# Altium PCB USB_to_CAN.PcbDoc
Units mil, origin at the board's own origin, x right, y up, seen from the top; angles counter-clockwise.
Board outline 3030 x 1665 mil, 2 copper layers (Top Layer, Bottom Layer); 33 components, 27 nets, 158 pads, 26 vias.
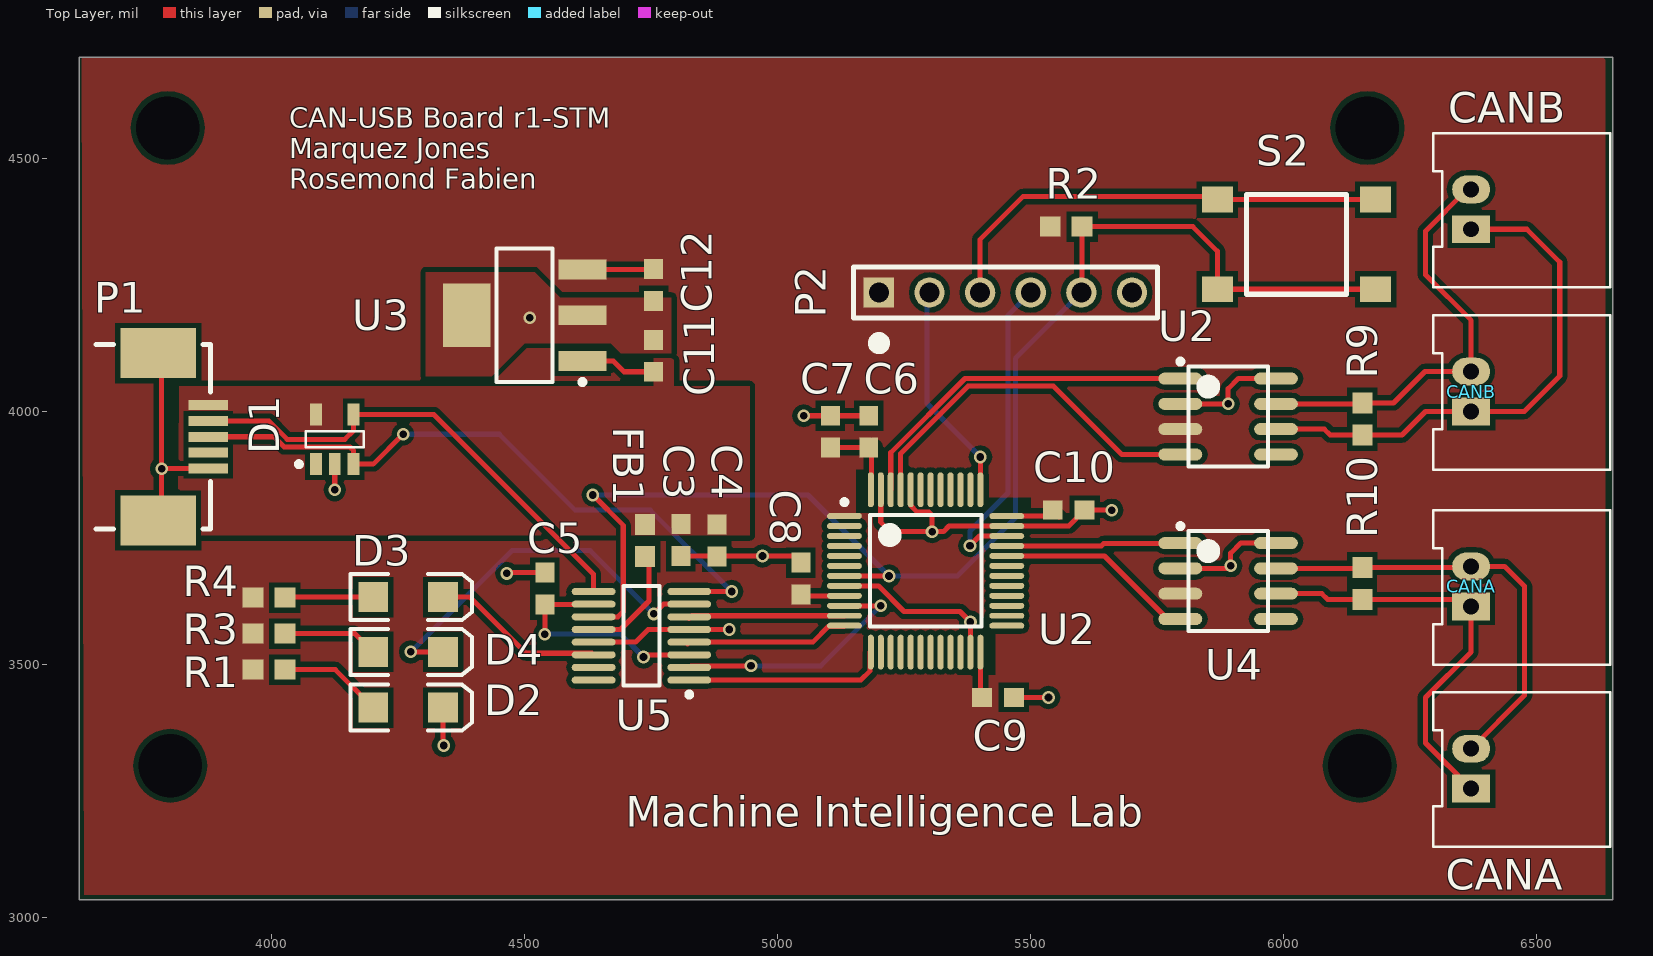
[diagram p0: Top Layer view]
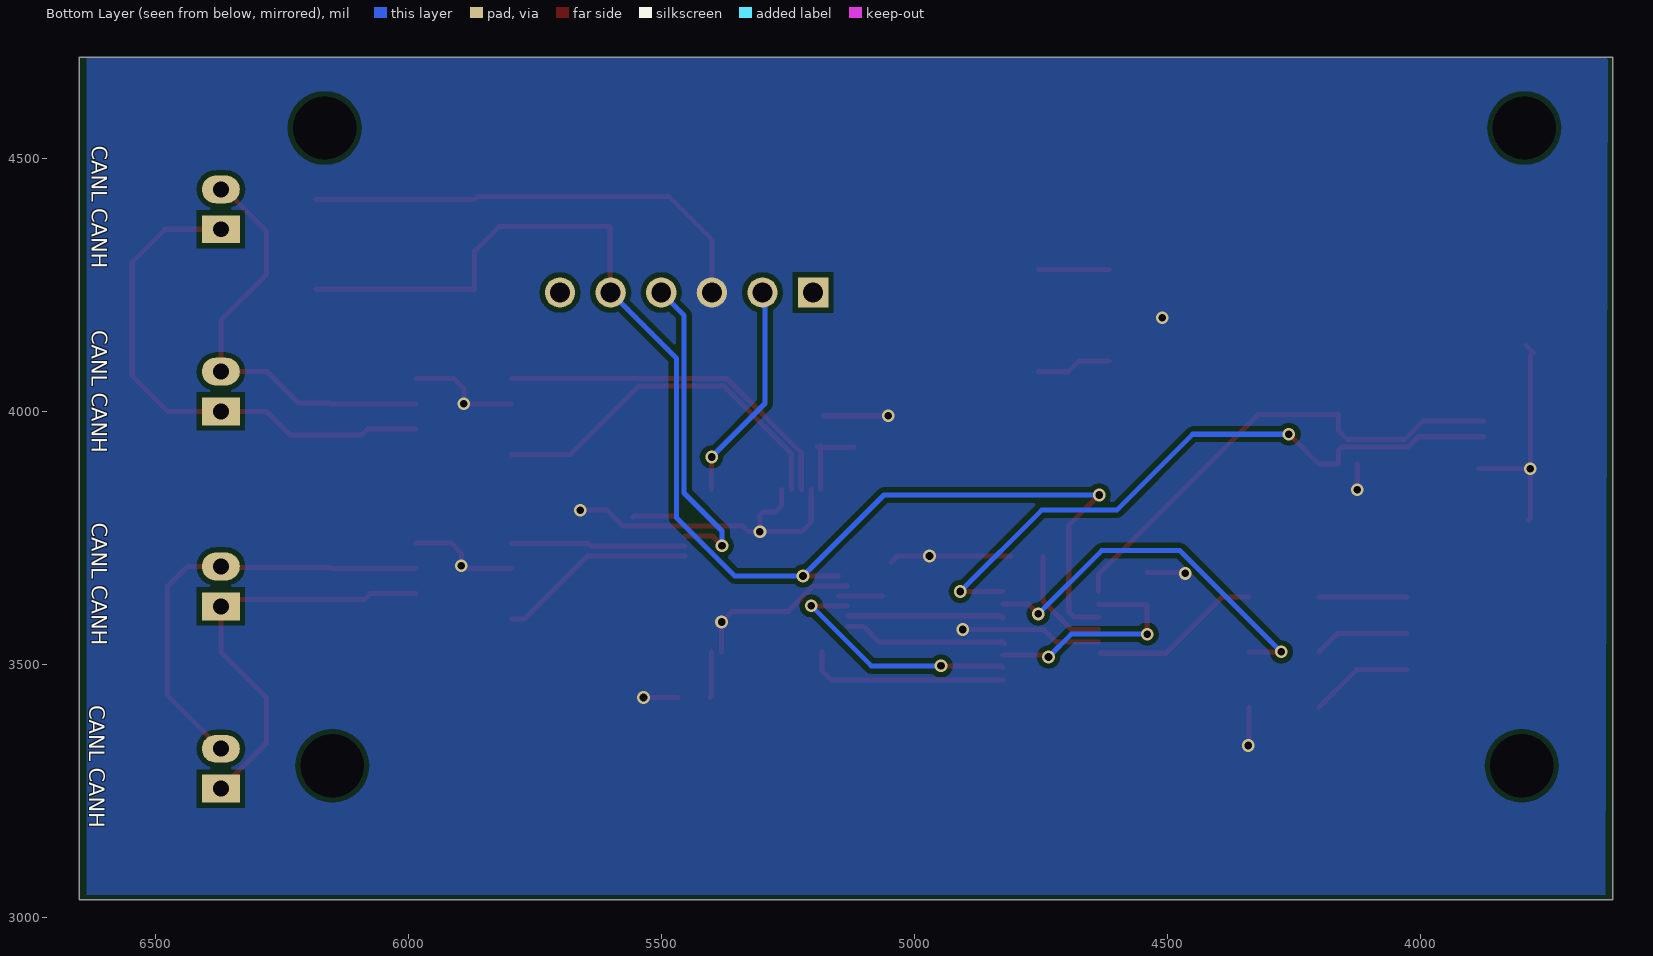
[diagram p1: Bottom Layer view, seen from below]

## Layer stack, top to bottom
Top Solder: solder mask 0.4, Solder Resist, Dk 3.5
Top Layer: signal copper 1.4
Dielectric 1: dielectric 12.6, FR-4, Dk 4.8
Bottom Layer: signal copper 1.4
Bottom Solder: solder mask 0.4, Solder Resist, Dk 3.5

## Board outline
3620,3035 3620,4700 6650,4700 6650,3035

## Design rules (kind name [scope] priority, off if disabled: settings)
Clearance [All] p1: gap=10 ignorepadtopadclearanceinfootprint=FALSE except(0: Arc-Hole Track-Hole SMDPad-Hole THPad-Hole Via-Hole Fill-Hole Poly-Hole Region-Hole Text-Hole; 5: Track-Track Track-SMDPad SMDPad-SMDPad; 7: Track-Via)
MinimumSolderMaskSliver [All] p1: minsoldermaskwidth=5
PolygonConnect [All] p1: connectstyle=Direct reliefconductorwidth=10 reliefentries=4 polygonreliefangle="90 Angle" airgapwidth=10
RoutingVias [All] p1: holewidth=28 width=50 viastyle="Through Hole" minholewidth=28 minwidth=50 maxholewidth=28 maxwidth=50
SolderMaskExpansion [All] p1: expansion=4
Width [All] p1: maxlimit=10 minlimit=10 preferedwidth=10
29 further rules are at their usual default settings.

## Classes and differential pairs
component class USB_to_CAN: C3 C4 C5 C6 C7 C8 C9 C10 C11 C12 CANA CANB D1 D2 D3 D4 FB1 P1 P2 R1 R2 R3 R4 R9 R10 S2 U2 U3 U4 U5

## Components (designator, comment, footprint, x,y, rotation, side; value= is the part's Value field where it differs from the comment)
C3 "Cap" CAPC0603 4808.97,3745.97 r270 top value=4.7uF
C4 "Cap" CAPC0603 4880,3745 r270 top value=100nF
C5 "Cap" CAPC0603 4540,3650 r90 top value=100nF
C6 "Cap" CAPC0603 5180,3960 r90 top value=1uF
C7 "Cap" CAPC0603 5103.97,3960 r90 top value=10nF
C8 "Cap" CAPC0603 5046.04,3670 r90 top value=100nF
C9 "Cap" CAPC0603 5435,3435 r0 top value=100nF
C10 "Cap" CAPC0603 5575,3805 r0 top value=100nF
C11 "Cap" CAPC0603 4755,4110 r90 top value=1uF
C12 "Cap" CAPC0603 4755,4250 r270 top value=1uF
CANA "2-pin Horz Sherlock" MOLEX-HDR-1X2-SHERLOCK-HORZ 6370,3615 r270 top
CANA "2-pin Horz Sherlock" MOLEX-HDR-1X2-SHERLOCK-HORZ 6370,3255 r270 top
CANB "2-pin Horz Sherlock" MOLEX-HDR-1X2-SHERLOCK-HORZ 6370,4360 r270 top
CANB "2-pin Horz Sherlock" MOLEX-HDR-1X2-SHERLOCK-HORZ 6370,4000 r270 top
D1 "824011" SOT95P280X116-5N 4125,3945 r90 top
D2 "LED2" 3.2X1.6X1.1 4270,3415 r0 top
D3 "LED2" 3.2X1.6X1.1 4270,3633.44 r0 top
D4 "LED2" 3.2X1.6X1.1 4270,3525 r0 top
FB1 "FBead" RES0603 4737.93,3745 r270 top
P1 "UX60SC-MB-5ST" UX60SC-MB-5ST 3874.99,3950 r270 top
P2 "SWD" SWD_STM32 5200,4235 r90 top
R1 "Res" RES0603 3995,3490 r0 top value=1k
R2 "Res" RES0603 5570,4365 r0 top value=1k
R3 "Res" RES0603 3995,3561.03 r0 top value=1k
R4 "Res" RES0603 3995,3632.07 r0 top value=1k
R9 "Res" RES0603 6155,3985 r90 top value=120
R10 "Res" RES0603 6155,3660 r90 top value=120
S2 "Button" PTS645xxxxSMTR92 6025,4330 r0 top
U2 "SN65HVD230DR" SOIC-8pin 5890,3990 r0 top
U2 "STM32F072CB" STM32F072CB 5292.27,3685 r0 top
U3 "3.3V LDO Reg" SOT23-4n 4500,4190 r180 top
U4 "SN65HVD230DR" SOIC-8pin 5890,3665 r0 top
U5 "FT230XS" FT230XS 4730.86,3556.76 r180 top

## Footprints (in the part's own frame and the unit in brackets; to place one, negate y for a bottom-side part, rotate by r counter-clockwise, add the part's x,y. Pads: shape width x height; smd on the part's side, far side on the other; paste and mask are expansions set on the pad)
3.2X1.6X1.1 [mm] "SMT LED; 2 Flat Leads"
  rect 1.5x1.5 smd: 1(-1.75,0) 2(1.75,0)
  silkscreen extent -2.9,-1.15 3.2,1.15
CAPC0603 [mm] "Chip Capacitor, 2-Leads, Body 1.60x0.80mm, IPC Medium Density"
  rect 1x0.95 smd: 1(-0.8,0) 2(0.8,0)
  body extent -0.88,-0.48 0.87,0.48, height 0.8
FT230XS [mm] "SOP, 16-Leads, Body 4.90x3.90mm, Pitch 0.64mm, IPC Medium Density"
  oval 2.2x0.35 smd: 1(-2.4,2.222) 2(-2.4,1.587) 3(-2.4,0.952) 4(-2.4,0.317) 5(-2.4,-0.318) 6(-2.4,-0.953) 7(-2.4,-1.588) 8(-2.4,-2.223) 9(2.4,-2.222) 10(2.4,-1.587) 11(2.4,-0.952) 12(2.4,-0.317) 13(2.4,0.318) 14(2.4,0.953) 15(2.4,1.588) 16(2.4,2.223)
  silkscreen extent -2.53,-2.5 0.9,3.07, body extent -2,-2.5 2,2.5, height 1.76
MOLEX-HDR-1X2-SHERLOCK-HORZ [mm]
  rect 1.397x1.905 hole 0.8: 1(0,0)
  oval 1.397x1.905 hole 0.8: 2(-2,0)
  silkscreen extent -4.83,-1.91 2.92,6.98, body extent -4.83,-1.91 2.87,8.59, height 5.54
PTS645xxxxSMTR92 [mm] "PTS645 Series SMT 6 mm Tactile Switch"
  rect 1.555x1.3 smd: A(-3.975,2.25) A(3.975,2.25) B(-3.975,-2.25) B(3.975,-2.25)
  silkscreen extent -2.5,-2.5 2.5,2.5, body extent -3,-3 3,3, height 4.5
RES0603 [mm] "Chip Resistor, 2-Leads, Body 1.60x0.80mm, IPC Medium Density"
  rect 1.05x1 smd: 1(-0.8,0) 2(0.8,0)
  body extent -0.88,-0.48 0.87,0.47, height 0.8
SOIC-8pin [mm] "For 296-1345-1-ND"
  oval 2.2x0.6 smd: 1(-2.4,1.905) 2(-2.4,0.635) 3(-2.4,-0.635) 4(-2.4,-1.905) 5(2.4,-1.905) 6(2.4,-0.635) 7(2.4,0.635) 8(2.4,1.905)
  silkscreen extent -2.52,-2.5 2,2.88, body extent -2,-2.5 2,2.5, height 1.75
SOT23-4n [mm] "SOT223, 4-Leads, Body 6.50x7.00mm (avg), Pitch 2.30mm, IPC Medium Density"
  rect 2.4x1 smd: 1(-2.9,2.3) 2(-2.9,0) 3(-2.9,-2.3)
  rect 2.4x3.2 smd: 4(2.9,0)
  silkscreen extent -3.03,-3.35 1.4,3.47, body extent -1.85,-3.35 1.85,3.35, height 1.7
SOT95P280X116-5N [mm] "SOT23, 5-Leads, Body 2.90x2.80mm, Pitch 0.95mm, IPC Medium Density"
  rect 1.1x0.6 smd: 1(-1.25,0.95) 2(-1.25,0) 3(-1.25,-0.95) 4(1.25,-0.95) 5(1.25,0.95)
  silkscreen extent -1.37,-1.45 0.4,1.92, body extent -0.8,-1.45 0.8,1.45, height 1.16
STM32F072CB [mm] "TSQFP, 48-Leads, Body 7.00x7.00mm, Pitch 0.50mm, IPC Medium Density"
  oval 1.75x0.3 smd: 1(-4.075,2.75) 2(-4.075,2.25) 3(-4.075,1.75) 4(-4.075,1.25) 5(-4.075,0.75) 6(-4.075,0.25) 7(-4.075,-0.25) 8(-4.075,-0.75) 9(-4.075,-1.25) 10(-4.075,-1.75) 11(-4.075,-2.25) 12(-4.075,-2.75) 25(4.075,-2.75) 26(4.075,-2.25) 27(4.075,-1.75) 28(4.075,-1.25) 29(4.075,-0.75) 30(4.075,-0.25) 31(4.075,0.25) 32(4.075,0.75) 33(4.075,1.25) 34(4.075,1.75) 35(4.075,2.25) 36(4.075,2.75)
  oval 0.3x1.75 smd: 13(-2.75,-4.075) 14(-2.25,-4.075) 15(-1.75,-4.075) 16(-1.25,-4.075) 17(-0.75,-4.075) 18(-0.25,-4.075) 19(0.25,-4.075) 20(0.75,-4.075) 21(1.25,-4.075) 22(1.75,-4.075) 23(2.25,-4.075) 24(2.75,-4.075) 37(2.75,4.075) 38(2.25,4.075) 39(1.75,4.075) 40(1.25,4.075) 41(0.75,4.075) 42(0.25,4.075) 43(-0.25,4.075) 44(-0.75,4.075) 45(-1.25,4.075) 46(-1.75,4.075) 47(-2.25,4.075) 48(-2.75,4.075)
  silkscreen extent -4.2,-2.8 2.8,3.57, body extent -3.5,-3.5 3.5,3.5, height 1.6
SWD_STM32 [mil] "SWD connector matching the pinout on STM Discovery Boards"
  rect 60x60 hole 39.37: 1(0,0)
  round 60 hole 39.37: 2(0,-100) 3(0,-200) 4(0,-300) 5(0,-400) 6(0,-500)
  silkscreen extent -110,-550 50,50
UX60SC-MB-5ST [mm] "USB Mini-B Recepticle"
  rect 0.5x2 smd: 1(-1.6,0) 2(-0.8,0) 3(0,0) 4(0.8,0) 5(1.6,0)
  rect 2.5x3.8 smd: SHD(-4.2,-2.5) SHD(4.2,-2.5)
  silkscreen extent -4.62,-5.63 4.62,0.13, body extent -4.9,-6.61 4.9,0.39, height 3.95

## Part data
C3: Supplier Part Number 1=311-1455-1-ND, Supplier 1=Digi-Key
C4 C5 C8 C9 C10: Supplier Part Number 1=1276-1000-1-ND, Supplier 1=Digi-Key
C11 C12: Manufacturer Part Number=C0603C105K8PACTU, Supplier Part Number 1=399-3118-1-ND, Supplier 1=Digi-Key
CANA CANA CANB CANB: library part MOLEX-HDR-1x2-SHERLOCK_RA, "Header, Molex, 2mm Pitch Sherlock Header, Single Row, Horizontal, 2 Circuits, Length 3.3mm,  0353630260", Manufacturer="Molex Inc", Manufacturer Part Number=0353630260, Supplier Part Number 1=WM18931-ND, Supplier 1=Digi-Key
D1: "USB ESD Protection Diodes"
D2 D3 D4: "Typical RED, GREEN, YELLOW, AMBER GaAs LED", LatestRevisionDate=17-Jul-2002, LatestRevisionNote="Re-released for DXP Platform.", PackageDescription="SM LED; 2 Flat Leads", PackageReference=3.2X1.6X1.1, PackageVersion=Feb-2002, Published=8-Jun-2000, Publisher="Altium Limited"
FB1: "Ferrite Bead", Supplier Part Number 1=445-2988-1-ND, Supplier 1=Digi-Key
P1: "USB Mini B Metal Shield SMT", Supplier Part Number 1=H11671CT-ND, Supplier 1=Digi-Key
P2: library part SWD_STM32, "SWD connector matching the pinout on STM Discovery Boards"
R1 R3 R4 R9 R10: Supplier Part Number 1=RMCF0603JT10K0CT-ND, Supplier 1=Digi-Key
S2: "SPST Button", Supplier Part Number 1=CKN9087CT-ND, Supplier 1=Digi-Key
U2 U4: "IC TXRX CAN 1MBPS 3.3V 8SOIC", Supplier Part Numbe 1=296-11654-1-ND, Supplier 1=Digi-Key
U2: "MCU 32BIT 128KB FLASH 48LQFP", Supplier Part Number 1=497-14645-ND, Supplier 1=Digi-Key
U3: library part LM3940IMPX-3.3, "IC REG LDO 3.3V 1A SOT223", Supplier Part Number 1=LM3940IMPX-3.3/NOPBCT-ND, Supplier 1=Digi-Key
U5: "USB To Basic UART IC", Supplier Part Number 1=768-1154-5-ND, Supplier 1=Digi-Key
C6 C7 R2: Supplier 1=Digi-Key

## Free pads (board coordinates)
  round 60 hole 125: 10(6150,3300) 11(6165,4560) 12(3795,4560) 13(3800,3300)

## Via types
v1: diameter 25, hole 15, Top Layer to Bottom Layer, tented both sides, 25 vias
v2: diameter 25, hole 15, Top Layer to Bottom Layer, tented top, 1 vias

## Nets (pads, with @x,y where several pads share a name; then routed paths per layer and width w, separated by ;. In a path a pad name is that pad's centre, name@x,y a point inside that pad or via, vN(x,y) a via of type N, cw(c..) or ccw(c..) an arc to the next point about the centre after c; other vN are vias at no path point)
3V3: C6.1 C7.1 C8.1 C9.1 C10.1 C12.1 P2.1 R1.1 R2.1 R3.1 R4.1 U2.1@5131.84,3793.27 U2.3@5795.51,3965 U2.9 U2.24 U2.36 U2.48 U3.3 U4.3 | length 563.6
  Top Layer w10: U3.3 4754.06,4280.55 C12.1 ; C8.1@5062.72,3635.79 U2.9 U2.9@5149.57,3635.79 ; C7.1@5118.97,3928.5 C6.1 5185.51,3922.99 U2.48@5185.51,3845.43 ; C6.1@5185.51,3932.99 5185.51,3928.5 5190,3928.5 C6.1@5192.01,3930.51 ; U2.24 5400.54,3437.96 C9.1 ; U2.36@5470.43,3793.27 5554.46,3793.27 C10.1@5556.23,3791.5
5V: C3.1 C4.1 C11.1 D1.5 FB1.1 P1.1 U3.1 | length 149.5
  Top Layer w10: U3.1 4675.55,4099.45 4696.5,4078.5 C11.1
CAN_RXA: U2.32 U4.4 | length 394.4
  Top Layer w10: U2.32 5645.47,3714.53 5770,3590 U4.4
CAN_RXB: U2.4@5795.51,3915 U2.45 | length 734.9
  Top Layer w10: U2.45 5243.06,3916.85 5376.21,4050 5545,4050 5680,3915 U2.4@5795.51,3915
CAN_TXA: U2.33 U4.1 | length 345.2
  Top Layer w10: U2.33 5639.21,3734.21 5643.9,3738.9 5794.41,3738.9 U4.1
CAN_TXB: U2.1@5795.51,4065 U2.46 | length 705.8
  Top Layer w10: U2.46 5223.38,3918.38 5370,4065 U2.1@5795.51,4065
CANH_A: CANA.2 R10.2 U4.7 | length 872.9
  Top Layer w10: U4.7 6153.5,3690 R10.2 6367.76,3691.5 6370,3693.74 6436.26,3693.74 6475,3655 6475,3438.74 CANA.2@6370,3333.74
CANH_B: CANB.2 R9.2 U2.7@5984.49,4015 | length 850.8
  Top Layer w10: U2.7@5984.49,4015 6153.5,4015 R9.2 6216.5,4016.5 6278.74,4078.74 6370,4078.74 6370,4180 6280,4270 6280,4356.21 6362.53,4438.74 CANB.2@6370,4438.74
CANL_A: CANA.1 R10.1 U4.6 | length 830.4
  Top Layer w10: U4.6 6075,3640 6086.5,3628.5 R10.1 6356.5,3628.5 6370,3615 6370,3525 6280,3435 6280,3345 CANA.1@6370,3255
CANL_B: CANB.1 R9.1 U2.6@5984.49,3965 | length 1040.5
  Top Layer w10: U2.6@5984.49,3965 6080,3965 6091.5,3953.5 R9.1 6233.5,3953.5 6280,4000 6370,4000 6475,4000 6545,4070 6545,4295 6480,4360 CANB.1@6370,4360
CTS: U2.10 U5.2 | length 501.1
  Top Layer w10: U5.2 4828.45,3497.37 v1(4947.37,3497.37) ; U2.10 v1(5203.9,3616.1)
  Bottom Layer w10: v1(4947.37,3497.37) 5085.17,3497.37 v1(5203.9,3616.1)
Dminus: D1.4 P1.2 U5.9 | length 980.6
  Top Layer w10: P1.2 3994.72,3981.5 4031.21,3945 4145,3945 4162.4,3962.4 D1.4 4320.79,3994.21 4636.37,3678.63 U5.9
Dplus: D1.3 P1.3 U5.8 | length 1309.6
  Top Layer w10: P1.3 4005,3950 4025,3930 4155,3930 4162.4,3922.6 D1.3 4200.79,3895.79 v1(4260,3955) ; U5.8 v1(4909.26,3644.26)
  Bottom Layer w10: v1(4260,3955) 4450,3955 4600,3805 4748.52,3805 v1(4909.26,3644.26)
GND: C3.2 C4.2 C5.2 C6.2 C7.2 C8.2 C9.2 C10.2 C11.2 C12.2 D1.2 D2.2 P1.5 P1.SHD P2.3 S2.A U2.2@5795.51,4015 U2.8 U2.23 U2.35 U2.44 U2.47 U3.2 U3.4 U4.2 U4.8 U5.5 U5.13 | length 3742.1
  Top Layer w10: P1.SHD@3776.56,4115.35 P1.SHD@3791.21,4130 ; P1.SHD@3782.99,4111.77 v1(3782.99,3887.01) ; P1.SHD@3786.57,3784.65 3782.99,3788.23 v1(3782.99,3887.01) ; P1.5@3885,3887.01 P1.5 v1(3782.99,3887.01) ; v1(4125,3845) D1.2 ; v1@4338.9,3341.1 D2.2 ; v1@4466.5,3681.5 C5.2 ; U5.13 4719.26,3544.26 4744.26,3569.26 U5.5 v1(4904.26,3569.26) v1@4905,3570 ; C3.2 v1(4970,3714.48) 5033.06,3714.48 C8.2 ; v1(5051.5,3991.5) C7.2 C6.2 ; U2.8@5131.84,3655.47 5199.18,3655.47 5249.65,3605 5360,3605 v1(5380.86,3584.14) U2.23 ; U2.47 5203.69,3781.31 5222.56,3762.44 v1@5304.93,3762.44 ; U2.44 5262.75,3814.08 5275.84,3800.98 5299.02,3800.98 5305,3795 v1(5305,3762.51) 5327.51,3762.51 5338.58,3773.58 U2.35 5575.08,3773.58 C10.2 v1(5660,3805) ; P2.3 5400,4340 5485,4425 5862.09,4425 5868.5,4418.58 S2.A@6181.5,4418.58 ; C9.2 v1(5535,3435) ; U4.2 5890,3690 v1(5895,3695) 5895,3720 5915,3740 U4.8 ; U2.2@5795.51,4015 v1(5890,4015) 5890,4045 5910,4065 U2.8@5984.49,4065
  other v1: 4340,3340 4465,3680
  other v2: 4510,4185
NetC5_1: C5.1 U5.3 U5.10 | length 460.9
  Top Layer w10: v1(4540,3560) C5.1 4635.61,3618.5 U5.10 ; v1(4735,3515) 4739.26,3519.26 U5.3
  Bottom Layer w10: v1(4540,3560) 4690,3560 v1(4735,3515)
NetD2_1: D2.1 R1.2 | length 205.7
  Top Layer w10: R1.2 4126.1,3490 D2.1
NetD3_1: D3.1 R4.2 | length 175.2
  Top Layer w10: R4.2 4027.86,3633.44 D3.1
NetD4_1: D4.1 R3.2 | length 189.5
  Top Layer w10: R3.2 4165.07,3561.03 D4.1
NetFB1_2: FB1.2 U5.12 | length 220.8
  Top Layer w10: U5.12 4689.6,3569.26 4746.03,3625.7 FB1.2@4746.03,3713.5
NRST: P2.5 R2.2 S2.B U2.7@5131.84,3675.16 U5.11 | length 2649
  Top Layer w10: v1(4635,3835) 4695,3775 4695,3605 4684.26,3594.26 U5.11 ; U2.7@5149.57,3675.16 5219.84,3675.16 v1(5220,3675) ; P2.5@5595,4230 P2.5 5601.5,4236.5 R2.2 5820,4365 5868.5,4316.5 5868.5,4241.42 S2.B@6181.5,4241.42
  Bottom Layer w10: v1(4635,3835) 5060,3835 v1(5220,3675) 5355,3675 5470,3790 5470,4105 P2.5
nRXLED: D3.2 U5.14 | length 340.4
  Top Layer w10: D3.2 4391.56,3633.44 4502.63,3522.37 U5.14@4633.26,3522.37
nTXLED: D4.2 U5.7 | length 756.8
  Top Layer w10: v1(4275,3525) D4.2 ; v1(4755,3600) 4774.26,3619.26 U5.7
  Bottom Layer w10: v1(4275,3525) 4475,3725 4630,3725 v1(4755,3600)
RTS: U2.11 U5.6 | length 311.8
  Top Layer w10: U5.6 4825.34,3591.15 4830.61,3596.42 U2.11
SWCLK: P2.2 U2.37 | length 439.8
  Top Layer w10: U2.37 v1(5400.54,3910) v1@5400.54,3914.46
  Bottom Layer w10: P2.2 5295,4230 5295,4015.54 v1(5400.54,3910)
SWDIO: P2.4 U2.34 | length 630.2
  Top Layer w10: v1(5380,3735) 5398.9,3753.9 U2.34
  Bottom Layer w10: v1(5380,3735) 5380,3763.79 5455,3838.79 5455,4190 P2.4
USART_RX: U2.13 U5.1 | length 401.9
  Top Layer w10: U5.1 5164.26,3469.26 5182.79,3487.79 U2.13@5182.79,3524.57
USART_TX: U2.12 U5.4 | length 323.8
  Top Layer w10: U5.4@4822.23,3541.15 U5.4 5069.26,3544.26 5100.51,3575.51 U2.12@5131.84,3575.51
pads on no net: D1.1 P1.4 P2.6 U2.2@5131.84,3773.58 U2.3@5131.84,3753.9 U2.4@5131.84,3734.21 U2.5 U2.6@5131.84,3694.84 U2.14 U2.15 U2.16 U2.17 U2.18 U2.19 U2.20 U2.21 U2.22 U2.25 U2.26 U2.27 U2.28 U2.29 U2.30 U2.31 U2.38 U2.39 U2.40 U2.41 U2.42 U2.43 U4.5 U5.15 U5.16

## Polygon pours and split planes (outlines as drawn)
3V3 on Top Layer "3V3" (solid, pour order 12): 3625,4700 6630,4700 6635,4695 6635,3045 3630,3045
5V on Top Layer "3V3" (solid, pour order 10): 4795,4105 4755,4105 4755,4015 4760,4020 4795,4020
5V on Top Layer "3V3" (solid, pour order 8): 3818.28,4050 4945,4050 4945,3755 3815,3755
no net on Top Layer "3V3" (solid, pour order 4): 4970,4135
GND on Top Layer "3V3" (solid, pour order 2): 4305,4275 4520,4275 4570,4225 4790,4225 4790,4115 4690,4115 4670,4135 4500,4135 4435,4070 4305,4070
GND on Bottom Layer "3V3" (solid, pour order 14): 3630,4695 3635,4700 6635,4700 6635,3045 3635,3045

## Other copper
Top Layer:
  pour cut-out: 5500.53,3777.97 5500,3778.51 5500,3830 5390,3830 5385,3825 5385,3780
  pour cut-out: 5505,3820
  pour cut-out: 5155,3885 5215,3885 5215,3800 5155,3800
  pour cut-out: 5358.13,3585.24 5429.76,3585.24 5430,3585 5430,3480 5356.01,3480 5354.97,3481.04
  pour cut-out: 5355.49,3480.52

## Silkscreen, mask and mechanical layers (free items; w line width, h text height)
Top Overlay:
  text "CAN-USB Board r1-STM / Marquez Jones  / Rosemond Fabien" at 4035,4440 h40
  text "Machine Intelligence Lab" at 4700,3180 h60
Bottom Overlay:
  text "CANL CANH" at 6625,4525 h30 r90
  text "CANL CANH" at 6625,4160 h30 r90
  text "CANL CANH" at 6625,3780 h30 r90
  text "CANL CANH" at 6630,3420 h30 r90
Mechanical 1:
  lines w10: 3620,3035 6650,3035 6650,4700 6640,4700 3620,4700 3620,3035